# Altium PCB BMW E34T Rear Lights v2.PcbDoc
Units mm, origin at the board's own origin, x right, y up, seen from the top; angles counter-clockwise.
Board outline 165 x 60 mm, 2 copper layers (Top Layer, Bottom Layer), stack 0.325 mm thick; 96 components, 66 nets, 256 pads, 256 vias.
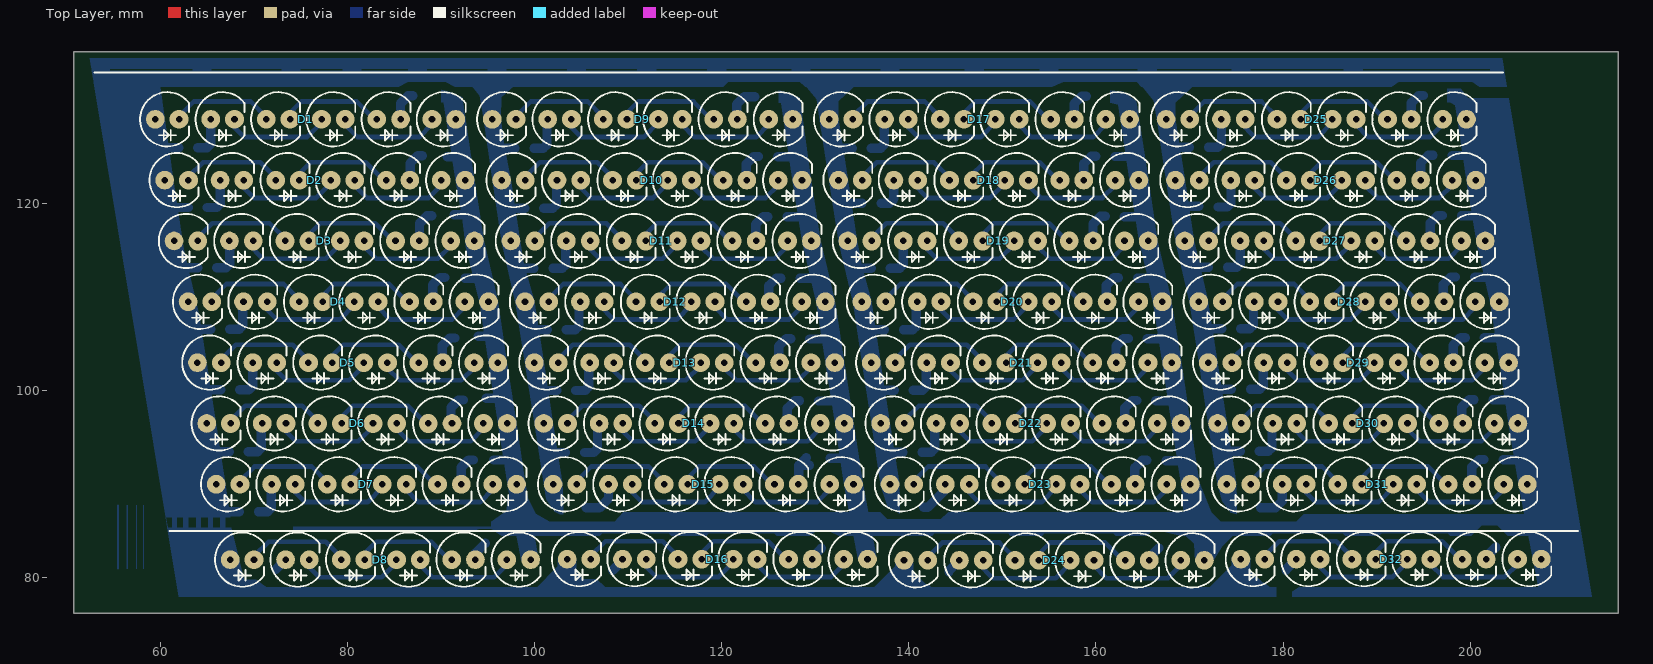
[diagram p0: Top Layer view]
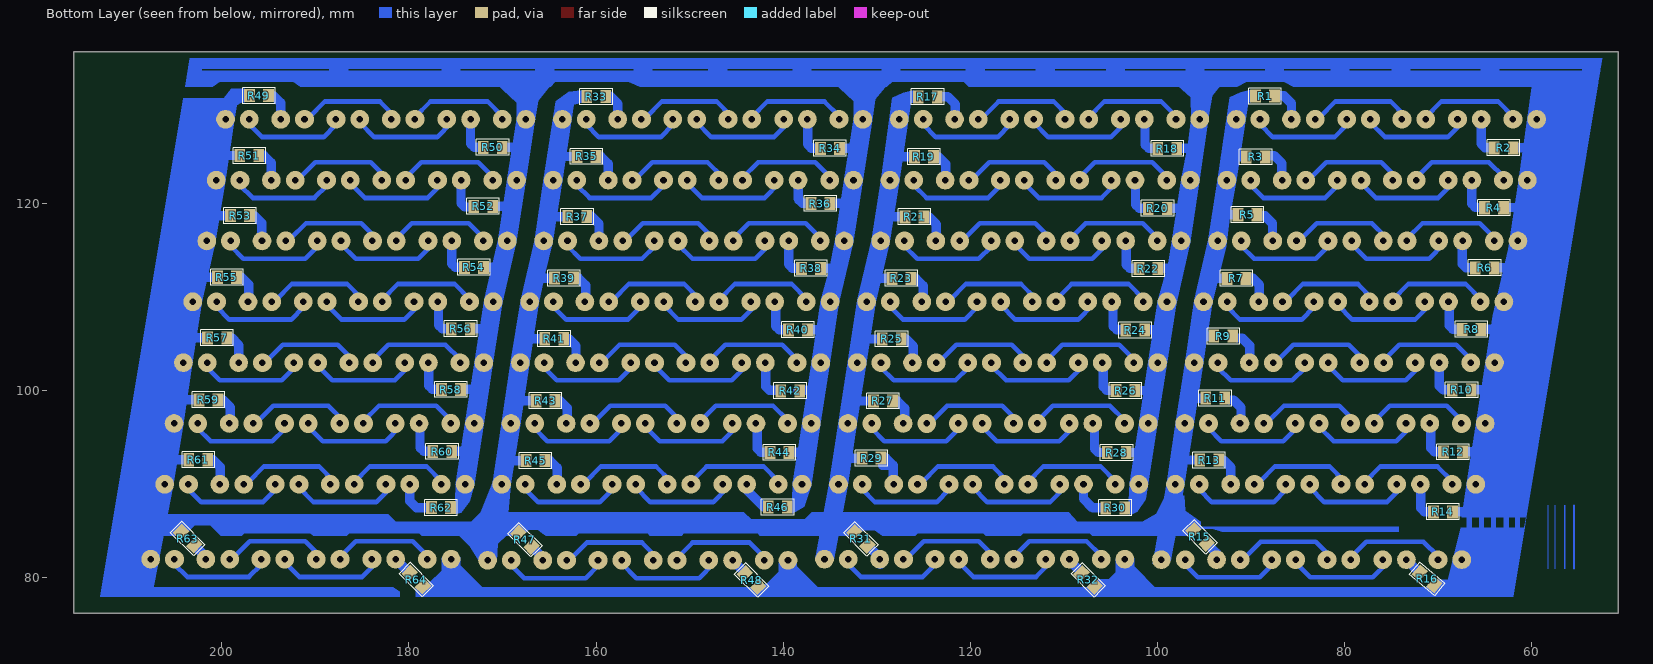
[diagram p1: Bottom Layer view, seen from below]

## Layer stack, top to bottom
Top Solder: solder mask 0.0102, Solder Resist, Dk 3.5
Top Layer: signal copper 0.0356
Dielectric 1: core 0.254, FR-4, Dk 4.2
Bottom Layer: signal copper 0.0356
Bottom Solder: solder mask 0.0102, Solder Resist, Dk 3.5

## Board outline
50.8,76.2 215.8,76.2 215.8,136.2 50.8,136.2

## Design rules (kind name [scope] priority, off if disabled: settings)
Clearance [All] p1: gap=0.5
HoleSize [All] p1: absolutevalues=TRUE maxlimit=1 minlimit=0.7 maxpercent=80.000 minpercent=20.000
PolygonConnect [All] p1: connectstyle=Relief reliefconductorwidth=0.254 reliefentries=4 polygonreliefangle="90 Angle" airgapwidth=0.254
RoutingVias [All] p1: holewidth=0.7 width=1.5 viastyle="Through Hole" minholewidth=0.711 minwidth=1.27 maxholewidth=0.711 maxwidth=1.27
SilkToSolderMaskClearance [IsPad] p1: minsilkscreentomaskgap=0.1 clearancetoexposedcopper=TRUE
SolderMaskExpansion [All] p1: expansion=0.102
Width [All] p1: maxlimit=1 minlimit=0.2 preferedwidth=1
27 further rules are at their usual default settings.

## Components (designator, comment, footprint, x,y, rotation, side; value= is the part's Value field where it differs from the comment)
D1 "White" "LED Assembly Round 5mm White 6X 0.5mm" 59.5,129 r0 top
D2 "White" "LED Assembly Round 5mm White 6X 0.5mm" 60.5,122.5 r0 top
D3 "White" "LED Assembly Round 5mm White 6X 0.5mm" 61.5,116 r0 top
D4 "White" "LED Assembly Round 5mm White 6X 0.5mm" 63,109.5 r0 top
D5 "White" "LED Assembly Round 5mm White 6X 0.5mm" 64,103 r0 top
D6 "White" "LED Assembly Round 5mm White 6X 0.5mm" 65,96.5 r0 top
D7 "White" "LED Assembly Round 5mm White 6X 0.5mm" 66,90 r0 top
D8 "White" "LED Assembly Round 5mm White 6X 0.5mm" 67.5,81.95 r0 top
D9 "White" "LED Assembly Round 5mm White 6X 0.5mm" 95.5,129 r0 top
D10 "White" "LED Assembly Round 5mm White 6X 0.5mm" 96.5,122.5 r0 top
D11 "White" "LED Assembly Round 5mm White 6X 0.5mm" 97.5,116 r0 top
D12 "White" "LED Assembly Round 5mm White 6X 0.5mm" 99,109.5 r0 top
D13 "White" "LED Assembly Round 5mm White 6X 0.5mm" 100,103 r0 top
D14 "White" "LED Assembly Round 5mm White 6X 0.5mm" 101,96.5 r0 top
D15 "White" "LED Assembly Round 5mm White 6X 0.5mm" 102,90 r0 top
D16 "White" "LED Assembly Round 5mm White 6X 0.5mm" 103.5,82 r0 top
D17 "White" "LED Assembly Round 5mm White 6X 0.5mm" 131.5,129 r0 top
D18 "White" "LED Assembly Round 5mm White 6X 0.5mm" 132.5,122.5 r0 top
D19 "White" "LED Assembly Round 5mm White 6X 0.5mm" 133.5,116 r0 top
D20 "White" "LED Assembly Round 5mm White 6X 0.5mm" 135,109.5 r0 top
D21 "White" "LED Assembly Round 5mm White 6X 0.5mm" 136,103 r0 top
D22 "White" "LED Assembly Round 5mm White 6X 0.5mm" 137,96.5 r0 top
D23 "White" "LED Assembly Round 5mm White 6X 0.5mm" 138,90 r0 top
D24 "White" "LED Assembly Round 5mm White 6X 0.5mm" 139.5,81.875 r0 top
D25 "White" "LED Assembly Round 5mm White 6X 0.5mm" 167.5,129 r0 top
D26 "White" "LED Assembly Round 5mm White 6X 0.5mm" 168.5,122.5 r0 top
D27 "White" "LED Assembly Round 5mm White 6X 0.5mm" 169.5,116 r0 top
D28 "White" "LED Assembly Round 5mm White 6X 0.5mm" 171,109.5 r0 top
D29 "White" "LED Assembly Round 5mm White 6X 0.5mm" 172,103 r0 top
D30 "White" "LED Assembly Round 5mm White 6X 0.5mm" 173,96.5 r0 top
D31 "White" "LED Assembly Round 5mm White 6X 0.5mm" 174,90 r0 top
D32 "White" "LED Assembly Round 5mm White 6X 0.5mm" 175.5,82 r0 top
R1 "160 Om" "SMD 0805 (2012)" 87.5,131.5 r0 bottom
R2 "160 Om" "SMD 0805 (2012)" 62.009,125.975 r0 bottom
R3 "160 Om" "SMD 0805 (2012)" 88.5,125 r0 bottom
R4 "160 Om" "SMD 0805 (2012)" 63.034,119.575 r0 bottom
R5 "160 Om" "SMD 0805 (2012)" 89.375,118.825 r0 bottom
R6 "160 Om" "SMD 0805 (2012)" 64.034,113.15 r0 bottom
R7 "160 Om" "SMD 0805 (2012)" 90.55,112.025 r0 bottom
R8 "160 Om" "SMD 0805 (2012)" 65.434,106.575 r0 bottom
R9 "160 Om" "SMD 0805 (2012)" 91.95,105.85 r0 bottom
R10 "160 Om" "SMD 0805 (2012)" 66.484,100.1 r0 bottom
R11 "160 Om" "SMD 0805 (2012)" 92.825,99.225 r0 bottom
R12 "160 Om" "SMD 0805 (2012)" 67.409,93.475 r0 bottom
R13 "160 Om" "SMD 0805 (2012)" 93.475,92.6 r0 bottom
R14 "160 Om" "SMD 0805 (2012)" 68.484,87.075 r0 bottom
R15 "160 Om" "SMD 0805 (2012)" 94.735,83.675 r45 bottom
R16 "160 Om" "SMD 0805 (2012)" 70.4,79.25 r40 bottom
R17 "160 Om" "SMD 0805 (2012)" 123.55,131.425 r0 bottom
R18 "160 Om" "SMD 0805 (2012)" 97.934,125.9 r0 bottom
R19 "160 Om" "SMD 0805 (2012)" 123.95,125.025 r0 bottom
R20 "160 Om" "SMD 0805 (2012)" 98.959,119.5 r0 bottom
R21 "160 Om" "SMD 0805 (2012)" 124.95,118.6 r0 bottom
R22 "160 Om" "SMD 0805 (2012)" 99.959,113.075 r0 bottom
R23 "160 Om" "SMD 0805 (2012)" 126.35,112.025 r0 bottom
R24 "160 Om" "SMD 0805 (2012)" 101.359,106.5 r0 bottom
R25 "160 Om" "SMD 0805 (2012)" 127.4,105.55 r0 bottom
R26 "160 Om" "SMD 0805 (2012)" 102.409,100.025 r0 bottom
R27 "160 Om" "SMD 0805 (2012)" 128.325,98.925 r0 bottom
R28 "160 Om" "SMD 0805 (2012)" 103.334,93.4 r0 bottom
R29 "160 Om" "SMD 0805 (2012)" 129.55,92.825 r0 bottom
R30 "160 Om" "SMD 0805 (2012)" 103.5,87.5 r0 bottom
R31 "160 Om" "SMD 0805 (2012)" 130.974,83.464 r45 bottom
R32 "160 Om" "SMD 0805 (2012)" 106.675,79.075 r45 bottom
R33 "160 Om" "SMD 0805 (2012)" 158.975,131.45 r0 bottom
R34 "160 Om" "SMD 0805 (2012)" 133.984,125.925 r0 bottom
R35 "160 Om" "SMD 0805 (2012)" 160,125.05 r0 bottom
R36 "160 Om" "SMD 0805 (2012)" 135.009,120.025 r0 bottom
R37 "160 Om" "SMD 0805 (2012)" 161,118.625 r0 bottom
R38 "160 Om" "SMD 0805 (2012)" 136.009,113.1 r0 bottom
R39 "160 Om" "SMD 0805 (2012)" 162.4,112.05 r0 bottom
R40 "160 Om" "SMD 0805 (2012)" 137.409,106.525 r0 bottom
R41 "160 Om" "SMD 0805 (2012)" 163.45,105.575 r0 bottom
R42 "160 Om" "SMD 0805 (2012)" 138.225,100 r0 bottom
R43 "160 Om" "SMD 0805 (2012)" 164.375,98.95 r0 bottom
R44 "160 Om" "SMD 0805 (2012)" 139.384,93.425 r0 bottom
R45 "160 Om" "SMD 0805 (2012)" 165.45,92.55 r0 bottom
R46 "160 Om" "SMD 0805 (2012)" 139.575,87.575 r0 bottom
R47 "160 Om" "SMD 0805 (2012)" 166.874,83.364 r45 bottom
R48 "160 Om" "SMD 0805 (2012)" 142.65,79.05 r45 bottom
R49 "160 Om" "SMD 0805 (2012)" 195,131.55 r0 bottom
R50 "160 Om" "SMD 0805 (2012)" 170.009,126.025 r0 bottom
R51 "160 Om" "SMD 0805 (2012)" 196.025,125.15 r0 bottom
R52 "160 Om" "SMD 0805 (2012)" 171.05,119.725 r0 bottom
R53 "160 Om" "SMD 0805 (2012)" 197.025,118.725 r0 bottom
R54 "160 Om" "SMD 0805 (2012)" 172.034,113.2 r0 bottom
R55 "160 Om" "SMD 0805 (2012)" 198.425,112.15 r0 bottom
R56 "160 Om" "SMD 0805 (2012)" 173.434,106.625 r0 bottom
R57 "160 Om" "SMD 0805 (2012)" 199.475,105.675 r0 bottom
R58 "160 Om" "SMD 0805 (2012)" 174.484,100.15 r0 bottom
R59 "160 Om" "SMD 0805 (2012)" 200.4,99.05 r0 bottom
R60 "160 Om" "SMD 0805 (2012)" 175.409,93.525 r0 bottom
R61 "160 Om" "SMD 0805 (2012)" 201.475,92.65 r0 bottom
R62 "160 Om" "SMD 0805 (2012)" 175.55,87.525 r0 bottom
R63 "160 Om" "SMD 0805 (2012)" 202.899,83.489 r45 bottom
R64 "160 Om" "SMD 0805 (2012)" 178.475,79.1 r45 bottom

## Footprints (in the part's own frame and the unit in brackets; to place one, negate y for a bottom-side part, rotate by r counter-clockwise, add the part's x,y. Pads: shape width x height; smd on the part's side, far side on the other; paste and mask are expansions set on the pad)
"LED Assembly Round 5mm White 6X 0.5mm" [mm] "Assembly 6X in one line, distance 0.5mm"
  round 2 hole 0.7: A1(0,0) A2(5.92,0) K1(26.2,0) K2(32.1,0)
  Bottom Layer lines w0.5: 2.54,0 2.54,0.34 4.1,1.9 10.2,1.9 11.86,0.24 11.86,0 ; 7.96,-0.36 9.5,-1.9 16.2,-1.9 17.76,-0.34 17.76,0 ; 8.46,-0.36 8.46,0 ; 14.1,0.4 15.6,1.9 21.5,1.9 23.16,0.24 ; 14.4,0 14.4,0.4 ; 20.3,0 20.3,-0.6 21.6,-1.9 28.2,-1.9 29.56,-0.54 29.56,0 ; 23.66,0 23.66,0.24
  silkscreen extent -1.62,-2.9 33.16,2.9, body extent -1.71,-3.01 33.27,3.01, height 9.31
"SMD 0805 (2012)" [mil]
  rect 45x55 smd: 1(0.35,0.98) 2(80.35,0.98)
  silkscreen extent -29,-32 109,34, body extent 1,-24 80,26, height 18

## Part data
D1 D2 D3 D4 D5 D6 D7 D8 D9 D10 D11 D12 D13 D14 D15 D16 D17 D18 D19 D20 D21 D22 D23 D24 D25 D26 D27 D28 D29 D30 D31 D32: library part "Led Assembly Round 5mm White 6X", "3.2-3.4v 25mA, 16-20cd"
R1 R2 R3 R4 R5 R6 R7 R8 R9 R10 R11 R12 R13 R14 R15 R16 R17 R18 R19 R20 R21 R22 R23 R24 R25 R26 R27 R28 R29 R30 R31 R32 R33 R34 R35 R36 R37 R38 R39 R40 R41 R42 R43 R44 R45 R46 R47 R48 R49 R50 R51 R52 R53 R54 R55 R56 R57 R58 R59 R60 R61 R62 R63 R64: library part "Res SMD 0805"

## Via types
v1: diameter 2, hole 0.7, Top Layer to Bottom Layer, 256 vias

## Nets (pads, with @x,y where several pads share a name; then routed paths per layer and width w, separated by ;. In a path a pad name is that pad's centre, name@x,y a point inside that pad or via, vN(x,y) a via of type N, cw(c..) or ccw(c..) an arc to the next point about the centre after c; other vN are vias at no path point)
GND: D1.K2 D2.K2 D3.K2 D4.K2 D5.K2 D6.K2 D7.K2 D8.K2 D9.K2 D10.K2 D11.K2 D12.K2 D13.K2 D14.K2 D15.K2 D16.K2 D17.K2 D18.K2 D19.K2 D20.K2 D21.K2 D22.K2 D23.K2 D24.K2 D25.K2 D26.K2 D27.K2 D28.K2 D29.K2 D30.K2 D31.K2 D32.K2 R1.2 R3.2 R5.2 R7.2 R9.2 R11.2 R13.2 R15.2 R17.2 R19.2 R21.2 R23.2 R25.2 R27.2 R29.2 R31.2 R33.2 R35.2 R37.2 R39.2 R41.2 R43.2 R45.2 R47.2 R49.2 R51.2 R53.2 R55.2 R57.2 R59.2 R61.2 R63.2 | length 47.1
  Bottom Layer w1: R3.2@90.691,125 92.325,125 ; R5.2 92.7,118.8 ; R7.2 94.325,112 ; R9.2 95.5,105.825 ; R11.2 96.475,99.2 ; R13.2@95.666,92.6 97.325,92.6 ; R19.2 127.875,125 ; R21.2 128.825,118.575 ; R23.2 130.225,112 ; R25.2 131.5,105.525 ; R27.2 132.55,98.9 ; R29.2 133.375,92.8 ; R35.2 164.075,125.025 ; R37.2 165.075,118.6 ; R39.2 166.075,112.025 ; R41.2 167.175,105.55 ; R43.2 168.4,98.925 ; R45.2 169.325,92.525 ; R51.2 201.575,125.125 ; R53.2 201.225,118.7 ; R55.2 202.9,112.125 ; R57.2 203.775,105.65 ; R59.2 204.65,99.025 ; R61.2 205.85,92.625
NetD1_A2: D1.A2 R2.2 | length 4.2
  Bottom Layer w1: R2.2@64.041,125.975 65.025,125.975 65.42,126.37 D1.A2
NetD1_K1: D1.K1 R1.1 | length 3.3
  Bottom Layer w1: D1.K1 85.7,130.7 86.5,131.5 R1.1@87,131.5
NetD2_A2: D2.A2 R4.2 | length 4.2
  Bottom Layer w1: R4.2@65.066,119.575 66.05,119.575 66.445,119.97 D2.A2@66.445,122.6
NetD2_K1: D2.K1 R3.1 | length 3.3
  Bottom Layer w1: D2.K1@86.725,122.6 86.725,124.3 87.525,125.1 R3.1@88.025,125.1
NetD3_A2: D3.A2 R6.2 | length 4.2
  Bottom Layer w1: R6.2@66.066,113.15 67.05,113.15 67.445,113.545 D3.A2@67.445,116.175
NetD3_K1: D3.K1 R5.1 | length 3.3
  Bottom Layer w1: D3.K1@87.725,116.175 87.725,117.875 88.525,118.675 R5.1@89.025,118.675
NetD4_A2: D4.A2 R8.2 | length 4.2
  Bottom Layer w1: R8.2@67.466,106.575 68.45,106.575 68.845,106.97 D4.A2@68.845,109.6
NetD4_K1: D4.K1 R7.1 | length 3.3
  Bottom Layer w1: D4.K1@89.125,109.6 89.125,111.3 89.925,112.1 R7.1@90.425,112.1
NetD5_A2: D5.A2 R10.2 | length 4.2
  Bottom Layer w1: R10.2@68.516,100.1 69.5,100.1 69.895,100.495 D5.A2@69.895,103.125
NetD5_K1: D5.K1 R9.1 | length 3.3
  Bottom Layer w1: D5.K1@90.175,103.125 90.175,104.825 90.975,105.625 R9.1@91.475,105.625
NetD6_A2: D6.A2 R12.2 | length 4.2
  Bottom Layer w1: R12.2@69.441,93.475 70.425,93.475 70.82,93.87 D6.A2@70.82,96.5
NetD6_K1: D6.K1 R11.1 | length 3.3
  Bottom Layer w1: D6.K1@91.1,96.5 91.1,98.2 91.9,99 R11.1@92.4,99
NetD7_A2: D7.A2 R14.2 | length 4.2
  Bottom Layer w1: R14.2@70.516,87.075 71.5,87.075 71.895,87.47 D7.A2@71.895,90.1
NetD7_K1: D7.K1 R13.1 | length 3.3
  Bottom Layer w1: D7.K1@92.175,90.1 92.175,91.8 92.975,92.6 R13.1@93.475,92.6
NetD8_A2: D8.A2 R16.2 | length 1.5
  Bottom Layer w1: R16.2@72.388,80.918 D8.A2
NetD8_K1: D8.K1 R15.1 | length 2.2
  Bottom Layer w1: D8.K1 93.7,82.64 R15.1@94.749,83.689
NetD9_A2: D9.A2 R18.2 | length 4.2
  Bottom Layer w1: R18.2@99.966,125.9 100.95,125.9 101.345,126.295 D9.A2@101.345,128.925
NetD9_K1: D9.K1 R17.1 | length 4
  Bottom Layer w1: D9.K1@121.625,128.925 121.625,130.625 122.425,131.425 R17.1@123.559,131.425
NetD10_A2: D10.A2 R20.2 | length 4.2
  Bottom Layer w1: R20.2@100.991,119.5 101.975,119.5 102.37,119.895 D10.A2@102.37,122.525
NetD10_K1: D10.K1 R19.1 | length 3.3
  Bottom Layer w1: D10.K1@122.65,122.525 122.65,124.225 123.45,125.025 R19.1@123.95,125.025
NetD11_A2: D11.A2 R22.2 | length 4.2
  Bottom Layer w1: R22.2@101.991,113.075 102.975,113.075 103.37,113.47 D11.A2@103.37,116.1
NetD11_K1: D11.K1 R21.1 | length 3.3
  Bottom Layer w1: D11.K1@123.65,116.1 123.65,117.8 124.45,118.6 R21.1@124.95,118.6
NetD12_A2: D12.A2 R24.2 | length 4.2
  Bottom Layer w1: R24.2@103.391,106.5 104.375,106.5 104.77,106.895 D12.A2@104.77,109.525
NetD12_K1: D12.K1 R23.1 | length 3.3
  Bottom Layer w1: D12.K1@125.05,109.525 125.05,111.225 125.85,112.025 R23.1@126.35,112.025
NetD13_A2: D13.A2 R26.2 | length 4.2
  Bottom Layer w1: R26.2@104.441,100.025 105.425,100.025 105.82,100.42 D13.A2@105.82,103.05
NetD13_K1: D13.K1 R25.1 | length 3.3
  Bottom Layer w1: D13.K1@126.1,103.05 126.1,104.75 126.9,105.55 R25.1@127.4,105.55
NetD14_A2: D14.A2 R28.2 | length 4.2
  Bottom Layer w1: R28.2@105.366,93.4 106.35,93.4 106.745,93.795 D14.A2@106.745,96.425
NetD14_K1: D14.K1 R27.1 | length 3.3
  Bottom Layer w1: D14.K1@127.025,96.425 127.025,98.125 127.825,98.925 R27.1@128.325,98.925
NetD15_A2: D15.A2 R30.2 | length 4.3
  Bottom Layer w1: R30.2 106.95,87.475 107.92,88.445 D15.A2
NetD15_K1: D15.K1 R29.1 | length 3.3
  Bottom Layer w1: D15.K1@128.25,90.325 128.25,92.025 R29.1@129.05,92.825 ; 128.9,92.025 129.4,92.025
NetD16_A2: D16.A2 R32.2 | length 1.6
  Bottom Layer w1: R32.2@108.361,80.801 109.42,81.86 D16.A2
NetD16_K1: D16.K1 R31.1 | length 2.2
  Bottom Layer w1: D16.K1@129.625,81.425 129.625,82.115 R31.1@130.674,83.164
NetD17_A2: D17.A2 R34.2 | length 4.2
  Bottom Layer w1: R34.2@136.016,125.925 137,125.925 137.395,126.32 D17.A2@137.395,128.95
NetD17_K1: D17.K1 R33.1 | length 3.3
  Bottom Layer w1: D17.K1@157.675,128.95 157.675,130.65 158.475,131.45 R33.1@158.975,131.45
NetD18_A2: D18.A2 R36.2 | length 3.6
  Bottom Layer w1: R36.2@137.05,120.025 137.95,120.025 138.42,120.495 D18.A2@138.42,122.55
NetD18_K1: D18.K1 R35.1 | length 3.3
  Bottom Layer w1: D18.K1@158.7,122.55 158.7,124.25 159.5,125.05 R35.1@160,125.05
NetD19_A2: D19.A2 R38.2 | length 4.2
  Bottom Layer w1: R38.2@138.041,113.1 139.025,113.1 139.42,113.495 D19.A2@139.42,116.125
NetD19_K1: D19.K1 R37.1 | length 3.3
  Bottom Layer w1: D19.K1@159.7,116.125 159.7,117.825 160.5,118.625 R37.1@161,118.625
NetD20_A2: D20.A2 R40.2 | length 4.2
  Bottom Layer w1: R40.2@139.441,106.525 140.425,106.525 140.82,106.92 D20.A2@140.82,109.55
NetD20_K1: D20.K1 R39.1 | length 3.3
  Bottom Layer w1: D20.K1@161.1,109.55 161.1,111.25 161.9,112.05 R39.1@162.4,112.05
NetD21_A2: D21.A2 R42.2 | length 4.2
  Bottom Layer w1: R42.2@140.491,100.05 141.475,100.05 141.87,100.445 D21.A2@141.87,103.075
NetD21_K1: D21.K1 R41.1 | length 3.3
  Bottom Layer w1: D21.K1@162.15,103.075 162.15,104.775 162.95,105.575 R41.1@163.45,105.575
NetD22_A2: D22.A2 R44.2 | length 4.2
  Bottom Layer w1: R44.2@141.416,93.425 142.4,93.425 142.795,93.82 D22.A2@142.795,96.45
NetD22_K1: D22.K1 R43.1 | length 3.3
  Bottom Layer w1: D22.K1@163.075,96.45 163.075,98.15 163.875,98.95 R43.1@164.375,98.95
NetD23_A2: D23.A2 R46.2 | length 3.7
  Bottom Layer w1: R46.2 142.05,87.55 143.92,89.42 D23.A2
NetD23_K1: D23.K1 R45.1 | length 3.3
  Bottom Layer w1: D23.K1@164.15,90.05 164.15,91.75 164.95,92.55 R45.1@165.45,92.55
NetD24_A2: D24.A2 R48.2 | length 1.7
  Bottom Layer w1: R48.2@144.311,80.651 144.311,80.766 D24.A2
NetD24_K1: D24.K1 R47.1 | length 2.2
  Bottom Layer w1: D24.K1@165.675,81.45 165.675,82.14 R47.1@166.724,83.189
NetD25_A2: D25.A2 R50.2 | length 4.2
  Bottom Layer w1: R50.2@172.041,126.025 173.025,126.025 173.42,126.42 D25.A2@173.42,129.05
NetD25_K1: D25.K1 R49.1 | length 3.3
  Bottom Layer w1: D25.K1@193.7,129.05 193.7,130.75 194.5,131.55 R49.1@195,131.55
NetD26_A2: D26.A2 R52.2 | length 4.2
  Bottom Layer w1: R52.2@173.066,119.625 174.05,119.625 174.445,120.02 D26.A2@174.445,122.65
NetD26_K1: D26.K1 R51.1 | length 3.3
  Bottom Layer w1: D26.K1@194.725,122.65 194.725,124.35 195.525,125.15 R51.1@196.025,125.15
NetD27_A2: D27.A2 R54.2 | length 4.2
  Bottom Layer w1: R54.2@174.066,113.2 175.05,113.2 175.445,113.595 D27.A2@175.445,116.225
NetD27_K1: D27.K1 R53.1 | length 3.3
  Bottom Layer w1: D27.K1@195.725,116.225 195.725,117.925 196.525,118.725 R53.1@197.025,118.725
NetD28_A2: D28.A2 R56.2 | length 4.2
  Bottom Layer w1: R56.2@175.466,106.625 176.45,106.625 176.845,107.02 D28.A2@176.845,109.65
NetD28_K1: D28.K1 R55.1 | length 3.3
  Bottom Layer w1: D28.K1@197.125,109.65 197.125,111.35 197.925,112.15 R55.1@198.425,112.15
NetD29_A2: D29.A2 R58.2 | length 4.2
  Bottom Layer w1: R58.2@176.516,100.15 177.5,100.15 177.895,100.545 D29.A2@177.895,103.175
NetD29_K1: D29.K1 R57.1 | length 3.3
  Bottom Layer w1: D29.K1@198.175,103.175 198.175,104.875 198.975,105.675 R57.1@199.475,105.675
NetD30_A2: D30.A2 R60.2 | length 4.2
  Bottom Layer w1: R60.2@177.441,93.525 178.425,93.525 178.82,93.92 D30.A2@178.82,96.55
NetD30_K1: D30.K1 R59.1 | length 3.3
  Bottom Layer w1: D30.K1@199.1,96.55 199.1,98.25 199.9,99.05 R59.1@200.4,99.05
NetD31_A2: D31.A2 R62.2 | length 4.4
  Bottom Layer w1: R62.2 179.2,87.5 179.92,88.22 D31.A2
NetD31_K1: D31.K1 R61.1 | length 3.3
  Bottom Layer w1: D31.K1@200.175,90.15 200.175,91.85 200.975,92.65 R61.1@201.475,92.65
NetD32_A2: D32.A2 R64.2 | length 1.7
  Bottom Layer w1: R64.2@180.311,80.801 180.311,80.891 D32.A2
NetD32_K1: D32.K1 R63.1 | length 2.2
  Bottom Layer w1: D32.K1@201.7,81.55 201.7,82.24 R63.1@202.749,83.289
VCC: D1.A1 D2.A1 D3.A1 D4.A1 D5.A1 D6.A1 D7.A1 D8.A1 D9.A1 D10.A1 D11.A1 D12.A1 D13.A1 D14.A1 D15.A1 D16.A1 D17.A1 D18.A1 D19.A1 D20.A1 D21.A1 D22.A1 D23.A1 D24.A1 D25.A1 D26.A1 D27.A1 D28.A1 D29.A1 D30.A1 D31.A1 D32.A1 R2.1 R4.1 R6.1 R8.1 R10.1 R12.1 R14.1 R16.1 R18.1 R20.1 R22.1 R24.1 R26.1 R28.1 R30.1 R32.1 R34.1 R36.1 R38.1 R40.1 R42.1 R44.1 R46.1 R48.1 R50.1 R52.1 R54.1 R56.1 R58.1 R60.1 R62.1 R64.1 | length 40.2
  Bottom Layer w1: 60.4,125.975 R2.1@62.009,125.975 ; 61.425,119.575 R4.1@63.034,119.575 ; 62.425,113.15 R6.1@64.034,113.15 ; 63.825,106.575 R8.1@65.434,106.575 ; 64.875,100.1 R10.1@66.484,100.1 ; 65.8,93.475 R12.1@67.409,93.475 ; 66.875,87.075 R14.1@68.484,87.075 ; 96.325,125.9 R18.1@97.934,125.9 ; 97.35,119.5 R20.1@98.959,119.5 ; 98.35,113.075 R22.1@99.959,113.075 ; 99.75,106.5 R24.1@101.359,106.5 ; 100.8,100.025 R26.1@102.409,100.025 ; 101.725,93.4 R28.1@103.334,93.4 ; 132.375,125.925 R34.1@133.984,125.925 ; 133.4,120.025 R36.1@135.009,120.025 ; 134.4,113.1 R38.1@136.009,113.1 ; 135.8,106.525 R40.1@137.409,106.525 ; 136.85,100.05 R42.1@138.459,100.05 ; 137.775,93.425 R44.1@139.384,93.425 ; 168.4,126.025 R50.1@170.009,126.025 ; 169.375,119.725 R52.1@170.984,119.725 ; 170.425,113.2 R54.1@172.034,113.2 ; 171.825,106.625 R56.1@173.434,106.625 ; 172.875,100.15 R58.1@174.484,100.15 ; 173.8,93.525 R60.1@175.409,93.525
copper on no net: | length 27
  Bottom Layer w0.05: 58.25,81 58.25,87.75
  Bottom Layer w0.1: 57.5,81 57.5,87.75
  Bottom Layer w0.15: 56.5,81 56.5,87.75
  Bottom Layer w0.2: 55.5,81 55.5,87.75
  other v1: 142.04,81.875 147.96,81.875 151.36,81.875 153.9,81.875 157.26,81.875 159.8,81.875 163.16,81.875 169.06,81.875 70.04,81.95 75.96,81.95 79.36,81.95 81.9,81.95 85.26,81.95 87.8,81.95 91.16,81.95 97.06,81.95 106.04,82 111.96,82 115.36,82 117.9,82 121.26,82 123.8,82 127.16,82 133.06,82 178.04,82 183.96,82 187.36,82 189.9,82 193.26,82 195.8,82 199.16,82 205.06,82 68.54,90 74.46,90 77.86,90 80.4,90 83.76,90 86.3,90 89.66,90 95.56,90 104.54,90 110.46,90 113.86,90 116.4,90 119.76,90 122.3,90 125.66,90 131.56,90 140.54,90 146.46,90 149.86,90 152.4,90 155.76,90 158.3,90 161.66,90 167.56,90 176.54,90 182.46,90 185.86,90 188.4,90 191.76,90 194.3,90 197.66,90 203.56,90 67.54,96.5 73.46,96.5 76.86,96.5 79.4,96.5 82.76,96.5 85.3,96.5 88.66,96.5 94.56,96.5 103.54,96.5 109.46,96.5 112.86,96.5 115.4,96.5 118.76,96.5 121.3,96.5 124.66,96.5 130.56,96.5 139.54,96.5 145.46,96.5 148.86,96.5 151.4,96.5 154.76,96.5 157.3,96.5 160.66,96.5 166.56,96.5 175.54,96.5 181.46,96.5 184.86,96.5 187.4,96.5 190.76,96.5 193.3,96.5 196.66,96.5 202.56,96.5 66.54,103 72.46,103 75.86,103 78.4,103 81.76,103 84.3,103 87.66,103 93.56,103 102.54,103 108.46,103 111.86,103 114.4,103 117.76,103 120.3,103 123.66,103 129.56,103 138.54,103 144.46,103 147.86,103 150.4,103 153.76,103 156.3,103 159.66,103 165.56,103 174.54,103 180.46,103 183.86,103 186.4,103 189.76,103 192.3,103 195.66,103 201.56,103 65.54,109.5 71.46,109.5 74.86,109.5 77.4,109.5 80.76,109.5 83.3,109.5 86.66,109.5 92.56,109.5 101.54,109.5 107.46,109.5 110.86,109.5 113.4,109.5 116.76,109.5 119.3,109.5 122.66,109.5 128.56,109.5 137.54,109.5 143.46,109.5 146.86,109.5 149.4,109.5 152.76,109.5 155.3,109.5 158.66,109.5 164.56,109.5 173.54,109.5 179.46,109.5 182.86,109.5 185.4,109.5 188.76,109.5 191.3,109.5 194.66,109.5 200.56,109.5 64.04,116 69.96,116 73.36,116 75.9,116 79.26,116 81.8,116 85.16,116 91.06,116 100.04,116 105.96,116 109.36,116 111.9,116 115.26,116 117.8,116 121.16,116 127.06,116 136.04,116 141.96,116 145.36,116 147.9,116 151.26,116 153.8,116 157.16,116 163.06,116 172.04,116 177.96,116 181.36,116 183.9,116 187.26,116 189.8,116 193.16,116 199.06,116 63.04,122.5 68.96,122.5 72.36,122.5 74.9,122.5 78.26,122.5 80.8,122.5 84.16,122.5 90.06,122.5 99.04,122.5 104.96,122.5 108.36,122.5 110.9,122.5 114.26,122.5 116.8,122.5 120.16,122.5 126.06,122.5 135.04,122.5 140.96,122.5 144.36,122.5 146.9,122.5 150.26,122.5 152.8,122.5 156.16,122.5 162.06,122.5 171.04,122.5 176.96,122.5 180.36,122.5 182.9,122.5 186.26,122.5 188.8,122.5 192.16,122.5 198.06,122.5 62.04,129 67.96,129 71.36,129 73.9,129 77.26,129 79.8,129 83.16,129 89.06,129 98.04,129 103.96,129 107.36,129 109.9,129 113.26,129 115.8,129 119.16,129 125.06,129 134.04,129 139.96,129 143.36,129 145.9,129 149.26,129 151.8,129 155.16,129 161.06,129 170.04,129 175.96,129 179.36,129 181.9,129 185.26,129 187.8,129 191.16,129 197.06,129

## Other copper
Bottom Layer:
  region net VCC: 66.45,85.35 66.95,85.35 66.95,86.5 66.45,86.5
  region net VCC: 61.3,85.35 61.8,85.35 61.8,86.5 61.3,86.5
  region net VCC: 65.15,85.35 65.65,85.35 65.65,86.5 65.15,86.5
  region net VCC: 63.875,85.35 64.375,85.35 64.375,86.5 63.875,86.5
  region net VCC: 62.5,85.35 63,85.35 63,86.5 62.5,86.5
  region net VCC: 60.775,85.425 60.6,86.475 60.625,86.475 60.8,85.425
  region net VCC: 69.45,78 67.6,85.375 60.775,85.425 62,78
  region net VCC: 53,132.5 52.475,135.5 54.625,135.5 54.625,132.5
  region net VCC: 63.5,135 65.5,135 65.5,133 63.5,133
  region net VCC: 79.5,135 81.5,135 81.5,133 79.5,133
  region net VCC: 95,135 97,135 97,133 95,133
  region net VCC: 111,135 113,135 113,133 111,133
  region net VCC: 127.5,135 129.5,135 129.5,133 127.5,133
  region net VCC: 146,135 148,135 148,133 146,133
  region net VCC: 164.5,135 166.5,135 166.5,133 164.5,133
  region net VCC: 73,135 75,135 75,133 73,133
  region net VCC: 86.5,135 88.5,135 88.5,133 86.5,133
  region net VCC: 103.5,135 105.5,135 105.5,133 103.5,133
  region net VCC: 118.5,135 120.5,135 120.5,133 118.5,133
  region net VCC: 137,135 139,135 139,133 137,133
  region net VCC: 154,135 156,135 156,133 154,133
  region net VCC: 174.5,135 176.5,135 176.5,133 174.5,133
  region net VCC: 186.5,135 188.5,135 188.5,133 186.5,133
  region net VCC: 203.9,132.5 203.4,135.5 202.125,135.5 202.125,132.5
  region net GND: 162.375,130.55 163.625,122.375 164.625,115.9 165.45,112.625 166.125,109.35 167.1,103.075 168.1,96.375 169.125,89.925 169.625,84.525 170.525,83.625 170.625,81.75 172.6,81.95 173.5,83.4 174.625,84.525 173.325,86 172.325,87 171.05,90.225 170.075,96.65 169.1,103.15 168.075,109.675 166.575,116.125 165.575,122.675 164.325,130.95 162.925,131.95 161.525,132.125 161.525,130.75
  region net GND: 126.387,130.7 127.625,122.35 128.625,115.9 130.125,109.425 131.125,102.9 132.125,96.425 133.125,89.85 134.625,81.9 136.6,82 135.075,90.15 132.075,109.65 130.575,116.175 129.55,122.675 128.362,131.325 127.188,131.825 126.112,132.1 126.137,130.75
  region net VCC: 166.538,128.813 167.5,122.4 168.525,115.85 170.025,109.35 171.025,102.875 172.025,96.4 173.025,89.875 173.5,88.175 174.4,86.95 175.075,86.8 175.075,88.2 174.975,90.1 173.975,96.675 172.975,103.15 171.95,109.725 170.45,116.175 169.475,122.65 168.487,129.063 168.487,130.788 170.737,132.838 164.687,132.838 166.188,130.963
  region net VCC: 176.512,82.163 176.512,80.762 177.862,79.413 177.862,78.938 172.212,78.938 172.162,78.988 174.537,81.363 174.537,82.213
  region net VCC: 130.5,128.9 131.525,122.375 132.525,115.85 134.05,109.325 135.025,102.875 136.025,96.375 137.025,89.85 137.75,87.625 139.05,86.85 139.05,88.2 138.975,90.15 137.975,96.575 136.975,103.125 135.975,109.65 135.075,112.925 134.475,116.2 133.475,122.65 132.475,129.125 132.45,130.95 134.7,133 128.65,133 130.15,131.125
  region net VCC: 140.5,81.625 140.513,80.637 141.862,79.287 141.862,78.813 136.212,78.813 136.162,78.862 138.538,81.238 138.55,81.6
  region net VCC: 104.475,82.025 104.475,80.625 105.825,79.275 105.825,78.8 100.175,78.8 100.125,78.85 102.5,81.225 102.5,82.075
  region net VCC: 94.537,129.362 95.538,122.313 96.512,115.863 98.038,109.263 99.012,102.788 100.037,96.363 101.25,88.4 102.189,87.069 102.725,86.775 103.1,86.775 103.1,88.2 102.975,90.175 101.962,96.688 100.987,103.113 99.987,109.637 98.85,113.55 98.463,116.213 97.487,122.588 96.8,126.1 96.425,129.1 96.487,131.338 98.737,133.388 92.687,133.388 94.188,131.513
  region net VCC: 177.725,79.475 177.45,78.925 178.7,78.9 178.05,79.475
  region net VCC: 141.85,79.3 141.425,78.825 142.55,78.825 142.1,79.3
  region net VCC: 104.9,79.875 105.6,78.65 107.9,78.7 107.45,79.1 106.65,79.875
  region net VCC: 69.875,79.8 68.35,79.8 68.7,78.8 71.7,78.75 70.3,79.8 69.9,79.8
  region net GND: 207.5,78 205.175,89.9 204.125,96.35 203.175,102.9 202.15,109.375 200.675,115.825 199.65,122.35 198.65,128.85 198.375,130.525 197.8,130.8 197.55,130.8 197.55,132.25 199,132.25 199.8,131.25 204.1,131.25 213,78
  region net GND: 93.15,84.95 74.25,84.95 74.25,85.45 95.875,85.45 95.875,85.225 94.15,85.225
  region net GND: 213,78 181,78 181,78.5 181.7,79 212.825,79
  region net VCC: 62,78 62,79 179.25,79 179.25,78
  region net VCC: 52.725,135.5 203.4,135.5 203.575,134.4 52.875,134.4
  region net VCC: 52.925,132.975 60.6,86.475 67.5,86.475 66.975,90.1 64.2,108 62.55,115.1 61.475,122.175 59.95,132.8
  region net GND: 90.325,130.75 91.625,122.375 92.3,118.525 92.65,115.425 94.15,109.325 95.125,102.925 96.125,96.375 97.15,89.9 97.95,85.125 98.35,83.325 98.625,81.85 100.5,81.5 99.05,90.1 98.075,96.625 97.075,103.075 96.075,109.675 94.575,116.125 93.575,122.625 92.3,131.375 91.125,131.875 90.05,132.15 90.075,130.8
  region net GND: 95.375,86 97.025,87.15 97.15,88.8 99.1,88.925 100.15,86.825 101.65,86 108.6,86 109.5,87 136.95,87 137.7,86.25 143.4,86.25 144.2,87.025 172.325,87 173.325,86 181.425,86 182.225,86.8 210.05,86.8 209.15,84.5 204,84.5 202.875,85.625 201.25,85.625 200.125,84.5 197.875,84.5 197.625,84.75 190.5,84.725 190.25,84.5 186.625,84.5 186.375,84.75 178.875,84.75 178.625,84.5 169,84.5 167.475,84.875 167.2,85.15 166.225,85.15 165.75,84.775 165.4,84.5 162.125,84.5 161.875,84.75 154.5,84.75 154.25,84.5 150.875,84.5 150.625,84.75 142.75,84.75 142.5,84.5 132.55,84.5 131.6,84.95 131.45,85.1 130.25,85.1 129.45,84.475 125.875,84.5 125.625,84.75 118.625,84.75 118.375,84.5 114.625,84.5 114.375,84.75 107.25,84.75 107,84.5 96.45,84.5 95.375,85.225
  region net VCC: 52.7,134.2 203.625,134.2 203.9,132.5 200.975,132.5 200.225,133 192.375,133 191.625,132.5 164.875,132.5 164.35,133 156.55,133 155.325,132.5 128.95,132.5 128.35,133 120.7,133 120.2,132.5 91.5,132.5 90.5,133 86.5,133 85.5,132.5 53,132.5

## Silkscreen, mask and mechanical layers (free items; w line width, h text height)
Top Overlay:
  lines w0.2: 53,134 203.5,134 ; 61,85 211.5,85
Drill Drawing:
  text ".LEGEND" at 220.85,81.5 h1.52
  text "Drill Drawing." at 220.88,78.74 h1.52